# EAGLE board ARM (EAGLE 8.5.0)
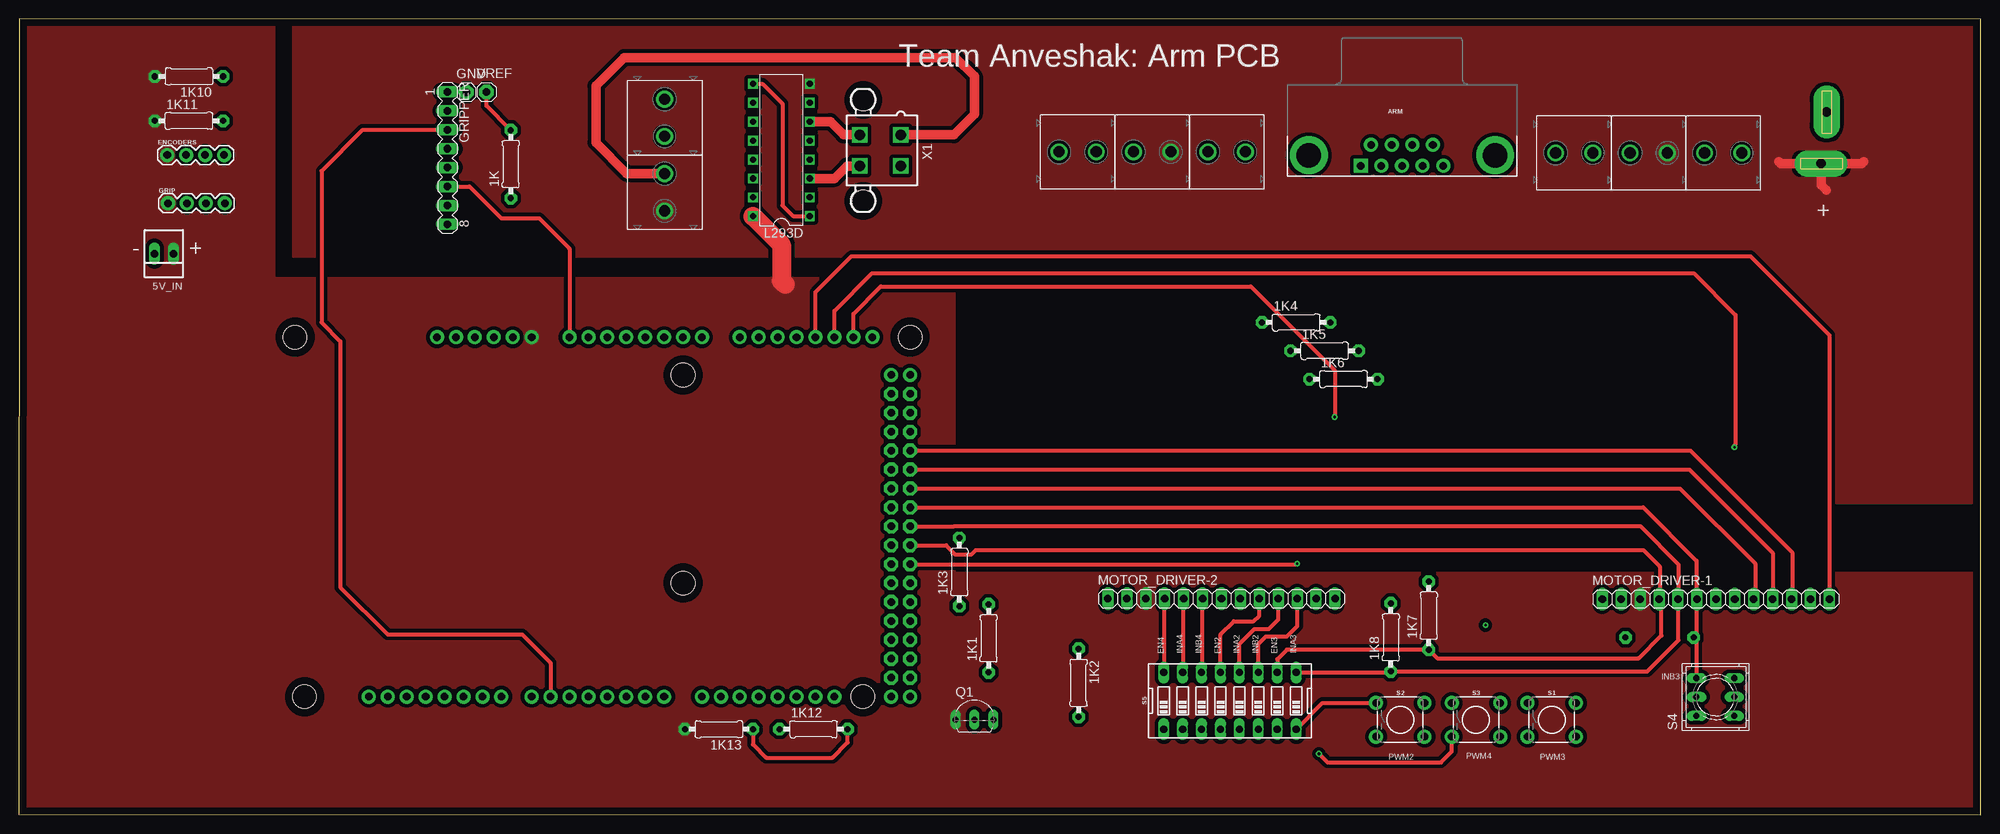
[diagram p0: board, top side]
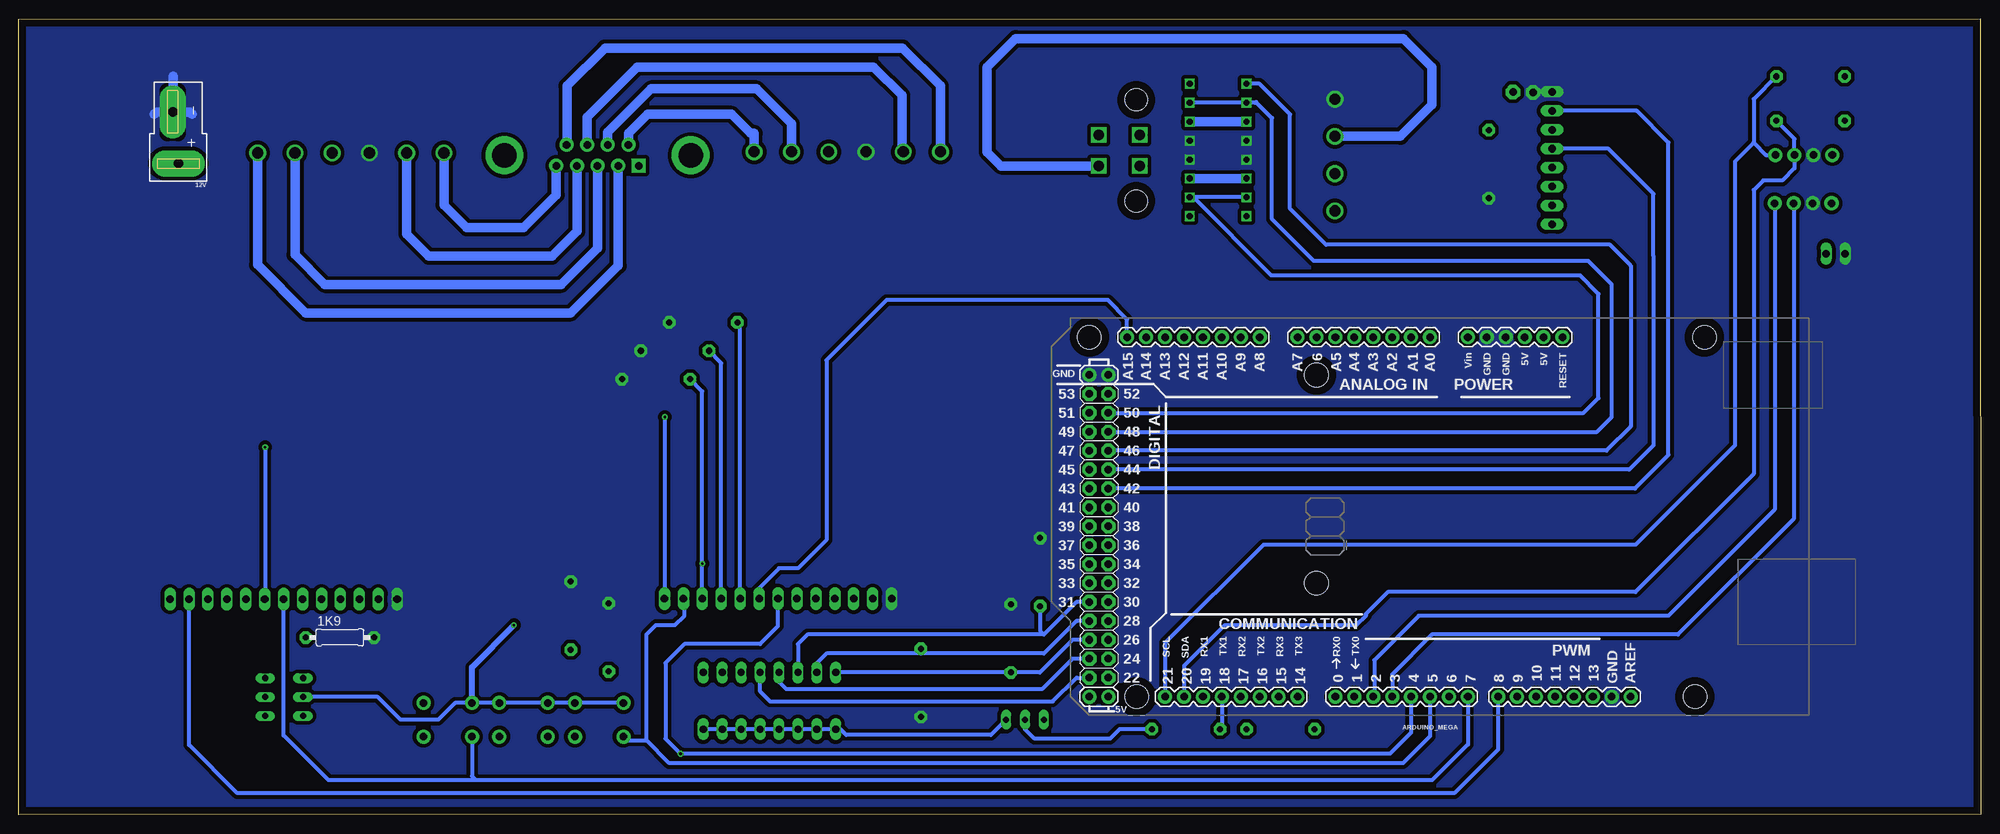
[diagram p1: board, bottom side, seen from below]

Size 263.33 x 106.9 mm. Coordinates in mm from the lower left corner, seen from the top.
Outline: 0,0.08 263.33,0 263.3,106.82 0.1,106.9 0,0.08
Copper layers (1*16): Top 0.035mm / dielectric 1.5mm / Bottom 0.035mm
Design rules "default *": minimum track width 6mil, minimum drill 0.35mm, track to track 20mil, track to pad 20mil, pad to pad 20mil, via to via 20mil, smd to smd 20mil, copper to edge 40mil, drill to drill 6mil, minimum pad ring 10mil, minimum via ring 8mil, stop-mask expansion 4mil, vias tented up to drill 0mil, thermal gap 10mil

## Footprints (pad centres in the part's own frame; a part is rotated, then mirrored left to right if it is on the bottom)
0207/9 = drill 0.813 pad 1.676 octagon: 1 -4.572,0; 2 4.572,0
22-23-2021 = drill 1 long: 1 -1.27,0; 2 1.27,0
DEANS = drill 1.27 pad 3.556 long: + 0,0; - 0.737,-6.921
ARDUINO_MEGA = drill 1.016 pad 1.88: 0 13.97,24.13; 1 11.43,24.13; 2 8.89,24.13; 3 6.35,24.13; 3.3V -13.97,-24.13; 4 3.81,24.13; 5 1.27,24.13; 5V@0 -11.43,-24.13; 5V@1 44.45,24.13; 5V@2 46.99,24.13; 6 -1.27,24.13; 7 -3.81,24.13; 8 -7.874,24.13; 9 -10.414,24.13; 10 -12.954,24.13; 11 -15.494,24.13; 12 -18.034,24.13; 13 -20.574,24.13; 14 19.05,24.13; 15 21.59,24.13; 16 24.13,24.13; 17 26.67,24.13; 18 29.21,24.13; 19 31.75,24.13; 20 34.29,24.13; 21 36.83,24.13; A0 1.27,-24.13; A1 3.81,-24.13; A2 6.35,-24.13; A3 8.89,-24.13; A4 11.43,-24.13; A5 13.97,-24.13; A6 16.51,-24.13; A7 19.05,-24.13; A8 24.13,-24.13; A9 26.67,-24.13; A10 29.21,-24.13; A11 31.75,-24.13; A12 34.29,-24.13; A13 36.83,-24.13; A14 39.37,-24.13; A15 41.91,-24.13; AREF -25.654,24.13; GND@0 -8.89,-24.13; GND@1 -6.35,-24.13; GND@2 44.45,-19.05; GND@3 46.99,-19.05; GND@4 -23.114,24.13; RESET -16.51,-24.13; VIN -3.81,-24.13 | drill 1.016 pad 1.88 octagon: 22 44.45,21.59; 23 46.99,21.59; 24 44.45,19.05; 25 46.99,19.05; 26 44.45,16.51; 27 46.99,16.51; 28 44.45,13.97; 29 46.99,13.97; 30 44.45,11.43; 31 46.99,11.43; 32 44.45,8.89; 33 46.99,8.89; 34 44.45,6.35; 35 46.99,6.35; 36 44.45,3.81; 37 46.99,3.81; 38 44.45,1.27; 39 46.99,1.27; 40 44.45,-1.27; 41 46.99,-1.27; 42 44.45,-3.81; 43 46.99,-3.81; 44 44.45,-6.35; 45 46.99,-6.35; 46 44.45,-8.89; 47 46.99,-8.89; 48 44.45,-11.43; 49 46.99,-11.43; 50 44.45,-13.97; 51 46.99,-13.97; 52 44.45,-16.51; 53 46.99,-16.51 | hole 3.2: -34.29,24.13; -35.56,-24.13; 16.51,8.89; 16.51,-19.05; 40.64,24.13; 46.99,-24.13
DB9 = drill 1.016 pad 1.88 square: 1 -5.54,-1.42 | drill 1.016 pad 1.88: 2 -2.77,-1.42; 3 0,-1.42; 4 2.77,-1.42; 5 5.54,-1.42; 6 -4.15,1.42; 7 -1.38,1.42; 8 1.38,1.42; 9 4.15,1.42 | drill 3.302 pad 5.08: G1 -12.5,0; G2 12.5,0
1X04 = drill 1.016 pad 1.88: 1 0,0; 2 2.54,0; 3 5.08,0; 4 7.62,0
1X01 = drill 1.016 pad 1.93 octagon: 1 0,0
MA08-1 = drill 1.016 long: 1 -8.89,0; 2 -6.35,0; 3 -3.81,0; 4 -1.27,0; 5 1.27,0; 6 3.81,0; 7 6.35,0; 8 8.89,0
DIL16 = drill 0.813 square: 1 -8.89,-3.81; 2 -6.35,-3.81; 3 -3.81,-3.81; 4 -1.27,-3.81; 5 1.27,-3.81; 6 3.81,-3.81; 7 6.35,-3.81; 8 8.89,-3.81; 9 8.89,3.81; 10 6.35,3.81; 11 3.81,3.81; 12 1.27,3.81; 13 -1.27,3.81; 14 -3.81,3.81; 15 -6.35,3.81; 16 -8.89,3.81
EK500V-02P = drill 1.5: P$1 0,0; P$2 5,0
1X13 = drill 1.016 long: 1 -15.24,0; 2 -12.7,0; 3 -10.16,0; 4 -7.62,0; 5 -5.08,0; 6 -2.54,0; 7 0,0; 8 2.54,0; 9 5.08,0; 10 7.62,0; 11 10.16,0; 12 12.7,0; 13 15.24,0
TO92-EBC-OVAL = drill 0.813 long: B 0,-1.27; C 2.54,-1.27; E -2.54,-1.27
TACTILE_SWITCH_PTH_6.0MM = drill 1.016 pad 1.88: 1 -3.251,2.261; 2 3.251,2.261; 3 -3.251,-2.261; 4 3.251,-2.261
9077-2 = drill 0.813 long: 1 -2.54,2.54; 2 0,2.54; 3 2.54,2.54; 4 -2.54,-2.54; 5 0,-2.54; 6 2.54,-2.54
DIPSWITCH-08 = drill 0.97 long: 1 -8.89,-3.81; 2 -6.35,-3.81; 3 -3.81,-3.81; 4 -1.27,-3.81; 5 1.27,-3.81; 6 3.81,-3.81; 7 6.35,-3.81; 8 8.89,-3.81; 9 8.89,3.81; 10 6.35,3.81; 11 3.81,3.81; 12 1.27,3.81; 13 -1.27,3.81; 14 -3.81,3.81; 15 -6.35,3.81; 16 -8.89,3.81
5566-4 = drill 1.4 square: 1 2.1,-2.75; 2 -2.1,-2.75; 3 2.1,2.75; 4 -2.1,2.75 | hole 3: 6.8,2.29; -6.8,2.29

## Placement (x,y rotation side)
1K  [0207/9]  66.03,87.37 90 top
1K1  [0207/9]  130.18,23.7 90 top
1K2  [0207/9]  142.24,17.73 270 top
1K3  [0207/9]  126.24,32.59 90 top
1K4  [0207/9]  171.45,66.12 0 top
1K5  [0207/9]  175.26,62.31 0 top
1K6  [0207/9]  177.8,58.5 0 top
1K7  [0207/9]  189.23,26.75 90 top
1K8  [0207/9]  184.15,23.83 90 top
1K9  [0207/9]  220.22,23.83 0 bottom
1K10  [0207/9]  22.86,99.14 180 top
1K11  [0207/9]  22.86,93.17 0 top
1K12  [0207/9]  106.68,11.51 0 top
1K13  [0207/9]  93.98,11.51 180 top
5V_IN  22-23-2021  [22-23-2021]  19.48,75.34 180 top
12V  [DEANS]  241.91,87.44 180 bottom
ARDUINO_MEGA  ARDUINO_MEGA_R3FULL  [ARDUINO_MEGA]  72.65,40.01 180 bottom
ARM  [DB9]  185.64,88.55 0 top
ENCODERS  [1X04]  19.94,88.6 0 top
GND  [1X01]  60.09,97.01 0 top
GRIP  [1X04]  20.04,82.12 0 top
GRIPPER  [MA08-1]  57.55,88.17 270 top
L293D  L293D  [DIL16]  102.36,89.26 90 top
M1  ST02-5MM  [EK500V-02P]  144.62,89.02 180 top
M2  ST02-5MM  [EK500V-02P]  164.62,89.02 180 top
M3  ST02-5MM  [EK500V-02P]  211.25,88.87 180 top
M4  ST02-5MM  [EK500V-02P]  231.25,88.87 180 top
MOTOR_DRIVER-1  [1X13]  227.77,28.97 0 top
MOTOR_DRIVER-2  [1X13]  161.42,29.02 0 top
PSCREW1  ST02-5MM  [EK500V-02P]  86.69,91.1 90 top
PSCREW2  ST02-5MM  [EK500V-02P]  86.69,81.1 90 top
PWR1  ST02-5MM  [EK500V-02P]  154.62,89.02 180 top
PWR2  ST02-5MM  [EK500V-02P]  221.25,88.87 180 top
Q1  2N2907  [TO92-EBC-OVAL]  128.27,14.05 0 top
S1  [TACTILE_SWITCH_PTH_6.0MM]  205.74,12.78 0 top
S2  [TACTILE_SWITCH_PTH_6.0MM]  185.42,12.78 0 top
S3  [TACTILE_SWITCH_PTH_6.0MM]  195.58,12.78 0 top
S4  9077-2  [9077-2]  227.71,15.83 90 top
S5  [DIPSWITCH-08]  162.56,15.32 0 top
VREF  [1X01]  62.79,97.05 0 top
X1  5566-4  [5566-4]  115.64,89.21 90 top

## Library data of the parts
1K 1K1-1K13 GND MOTOR_DRIVER-1 MOTOR_DRIVER-2 Q1 VREF = adafruit
5V_IN = con-molex; MF: MOLEX; MPN: 22-23-2021; OC_FARNELL: 1462926; OC_NEWARK: 25C3832
12V = SparkFun-Connectors; SF_ID: PRT-11864
ARDUINO_MEGA = SparkFun-Boards
ARM = SparkFun-Connectors; PROD_ID: CONN-08194
ENCODERS GRIP = SparkFun-Connectors; PROD_ID: CONN-09696
GRIPPER = con-lstb; OC_FARNELL: unknown; OC_NEWARK: unknown
L293D = Robocon2k14; MPN: L293D; OC_FARNELL: 9589619; OC_NEWARK: 56P8249
M1-M4 PSCREW1 PSCREW2 PWR1 PWR2 = con-dinkle
S1-S3 = SparkFun-Switches; PROD_ID: SWCH-08441; SF_SKU: COM-00097
S4 = switch-misc
S5 = SparkFun-Switches; PROD_ID: SWCH-12197; SF_SKU: COM-08034
X1 = con-molex; OC_FARNELL: unknown; OC_NEWARK: unknown

## Nets
2: ARM.5 M3.P$2
3: ARM.4 M3.P$1
3V3: GRIPPER.7
4: ARM.3 M4.P$2
5: ARM.2 M4.P$1
6: ARM.6 M2.P$1
7: ARM.7 M2.P$2
8: ARM.8 M1.P$1
9: ARM.9 M1.P$2
12V: 12V.+ L293D.8 PSCREW2.P$1 PWR1.P$1 PWR2.P$1
CS1: ARDUINO_MEGA.A12 MOTOR_DRIVER-1.13
CS2: ARDUINO_MEGA.A14 MOTOR_DRIVER-2.13
CS3: ARDUINO_MEGA.A13 MOTOR_DRIVER-1.8
CS4: ARDUINO_MEGA.A15 MOTOR_DRIVER-2.8
CS-G: ARDUINO_MEGA.A0 GRIPPER.6
DIR: ARDUINO_MEGA.42 GRIPPER.2
EN1: ARDUINO_MEGA.43 MOTOR_DRIVER-1.9
EN2: 1K4.1 ARDUINO_MEGA.25 MOTOR_DRIVER-2.9 S5.13
EN3: 1K7.1 ARDUINO_MEGA.37 MOTOR_DRIVER-1.4 S5.10
EN4: 1K1.1 ARDUINO_MEGA.27 MOTOR_DRIVER-2.4 S5.16
ENABLE: ARDUINO_MEGA.46 L293D.1 L293D.9
ENCA1: ARDUINO_MEGA.3 GRIP.3
ENCA2: ARDUINO_MEGA.2 GRIP.4
FLT: GRIPPER.5
GND: 1K1.2 1K2.2 1K3.2 1K4.2 1K5.2 1K6.2 1K7.2 1K8.2 1K9.2 1K.1 5V_IN.2 12V.- ARDUINO_MEGA.GND@0 ARDUINO_MEGA.GND@1 ARDUINO_MEGA.GND@2 ARDUINO_MEGA.GND@3 ARDUINO_MEGA.GND@4 ENCODERS.2 GND.1 GRIP.2 GRIPPER.1 L293D.4 L293D.5 L293D.12 L293D.13 MOTOR_DRIVER-1.1 MOTOR_DRIVER-2.1 PSCREW1.P$2 PWR1.P$2 PWR2.P$2
INA1: ARDUINO_MEGA.45 MOTOR_DRIVER-1.10
INA2: 1K5.1 ARDUINO_MEGA.23 MOTOR_DRIVER-2.10 S5.12
INA3: 1K8.1 ARDUINO_MEGA.39 MOTOR_DRIVER-1.5 S5.9
INA4: 1K2.1 ARDUINO_MEGA.29 MOTOR_DRIVER-2.5 S5.15
INB1: ARDUINO_MEGA.47 MOTOR_DRIVER-1.11
INB2: 1K6.1 ARDUINO_MEGA.35 MOTOR_DRIVER-2.11 S5.11
INB3: 1K9.1 ARDUINO_MEGA.41 MOTOR_DRIVER-1.6 S4.3
INB4: 1K3.1 ARDUINO_MEGA.31 MOTOR_DRIVER-2.6 S5.14
INPUT1: ARDUINO_MEGA.48 L293D.7 L293D.10
INPUT2: ARDUINO_MEGA.50 L293D.2 L293D.15
MANUAL_EN: 1K12.1 ARDUINO_MEGA.18
MOT1_A: L293D.3 L293D.14 X1.4
MOT1_B: L293D.6 L293D.11 X1.3
MOT2_A: PSCREW2.P$2 X1.1
MOT2_B: PSCREW1.P$1 X1.2
N$1: 1K.2 VREF.1
N$2: Q1.C S1.1 S2.1 S3.1 S4.2 S5.1 S5.2 S5.3 S5.4 S5.5 S5.6 S5.7 S5.8
N$4: 1K12.2 1K13.1 Q1.B
PWM1: ARDUINO_MEGA.8 MOTOR_DRIVER-1.12
PWM2: ARDUINO_MEGA.5 MOTOR_DRIVER-2.12 S2.3
PWM3: ARDUINO_MEGA.7 MOTOR_DRIVER-1.7 S1.3
PWM4: ARDUINO_MEGA.4 MOTOR_DRIVER-2.7 S3.3
PWM-G: ARDUINO_MEGA.6 GRIPPER.3
SCL: 1K10.1 ARDUINO_MEGA.21 ENCODERS.4
SDA: 1K11.2 ARDUINO_MEGA.20 ENCODERS.3
SLP: ARDUINO_MEGA.44 GRIPPER.4
VCC: 1K10.2 1K11.1 1K13.2 5V_IN.1 ARDUINO_MEGA.VIN ENCODERS.1 GRIP.1 L293D.16 MOTOR_DRIVER-1.3 MOTOR_DRIVER-2.3 Q1.E
VM: GRIPPER.8

## Tracks (layer width: path | path; a pad name or v marks a point on that pad's centre or on a via)
2
  Bottom 1.27: ARM.5 191.18,83.22 195.58,78.82 203.2,78.82 206.25,81.87 M3.P$2
3
  Bottom 1.27: M3.P$1 211.25,77.98 208.28,75.01 191.77,75.01 188.41,78.37 ARM.4
4
  Bottom 1.27: M4.P$2 226.25,75.2 222.25,71.2 190.5,71.2 185.64,76.06 ARM.3
5
  Bottom 1.27: M4.P$1 231.25,73.85 224.79,67.39 189.23,67.39 182.88,73.74 ARM.2
6
  Bottom 1.27: M2.P$1 164.62,91.52 165.1,91.52 167.64,94.06 178.95,94.06 181.49,91.52 ARM.6
7
  Bottom 1.27: M2.P$2 159.62,92.79 164.32,97.49 178.44,97.49 184.26,91.67 ARM.7
8
  Bottom 1.27: M1.P$1 144.78,89.18 144.78,96.6 148.59,100.41 180.34,100.41 187.07,93.68 187.07,90.02 ARM.8
9
  Bottom 1.27: ARM.9 189.74,90.02 189.74,97.87 184.66,102.95 144.7,102.95 139.62,97.87 M1.P$2
12V
  Top 1.27: 12V.+ 236.49,87.44 236.22,87.71 | 12V.+ 247.38,87.44 247.65,87.71 | 12V.+ 241.91,84.56 242.57,83.9
  pour Top (no thermals): 36.9,125.68 36.9,75.08 131.42,75.08 131.42,42.02 263.72,42.02 263.72,125.68
CS1
  Top 0.508: ARDUINO_MEGA.A12 106.94,70.19 111.76,75.01 232.41,75.01 243.01,64.41 MOTOR_DRIVER-1.13
CS2  (via drill 0.35)
  Top 0.508: ARDUINO_MEGA.A14 112.02,67.27 115.7,70.95 165.35,70.95 176.62,59.68 v176.62,53.42
  Bottom 0.508: MOTOR_DRIVER-2.13 176.62,28.98 v176.62,53.42
CS3  (via drill 0.35)
  Top 0.508: v230.25,49.36 230.25,49.61 230.38,49.74 230.38,67.14 224.79,72.73 114.55,72.73 109.48,67.65 ARDUINO_MEGA.A13
  Bottom 0.406: 230.25,29.01 MOTOR_DRIVER-1.8
  Bottom 0.508: MOTOR_DRIVER-1.8 | v230.25,49.36 230.25,29.01
CS4
  Bottom 0.508: MOTOR_DRIVER-2.8 164.02,28.96 164.02,30.37 161.29,33.1 158.75,33.1 154.94,36.91 154.94,61.04 146.85,69.13 122.67,69.13 117.17,69.13 114.56,66.52 ARDUINO_MEGA.A15
CS-G
  Top 0.508: GRIPPER.6 60.5,84.36 64.77,80.09 69.85,80.09 73.92,76.02 ARDUINO_MEGA.A0
  Bottom 0.508: 57.6,84.41 GRIPPER.6
DIR
  Top 0.508: 57.47,94.44 GRIPPER.2
  Bottom 0.508: ARDUINO_MEGA.42 46.43,43.82 41.91,48.34 41.91,90.25 46.18,94.52 GRIPPER.2
EN1
  Top 0.508: ARDUINO_MEGA.43 222.96,43.82 233.04,33.74 233.04,29.17 MOTOR_DRIVER-1.9
  Bottom 0.508: MOTOR_DRIVER-1.9
EN2
  Top 0.508: MOTOR_DRIVER-2.9 166.5,26.75 165.74,25.99 163.07,25.99 161.29,24.21 S5.13
  Bottom 0.508: ARDUINO_MEGA.25 121.92,20.96 126.01,16.87 160.3,16.87 161.29,17.86 S5.13 | 1K4.1 166.5,65.74 MOTOR_DRIVER-2.9
EN3
  Top 0.406: 220.22,28.9 MOTOR_DRIVER-1.4
  Top 0.508: ARDUINO_MEGA.37 124.46,36.2 125.66,35.01 127.89,35.01 128.45,35.57 218.01,35.57 220.22,33.36 220.22,28.9 220.47,28.65 220.47,24.08 217.42,21.04 190.37,21.04 1K7.1 170.18,22.18 168.91,20.91 S5.10
EN4
  Top 0.406: S5.16 153.8,19.26
  Top 0.508: 153.8,19.26 MOTOR_DRIVER-2.4
  Bottom 0.406: 1K1.1 130.81,19.13
  Bottom 0.508: ARDUINO_MEGA.27 121.92,23.5 126.29,19.13 1K1.1 S5.16
ENABLE
  Top 0.508: L293D.9 99.83,98.15 102.51,95.47 102.51,81.82 103.91,80.42 106.12,80.42 L293D.1
  Bottom 0.508: ARDUINO_MEGA.46 50.24,48.9 46.99,52.15 46.99,73.74 49.78,76.53 87.88,76.53 92.71,81.36 92.71,94.06 96.8,98.15 L293D.9
ENCA1
  Bottom 0.508: ARDUINO_MEGA.3 79,18.87 73.66,24.21 40.64,24.21 25.12,39.73 GRIP.3
ENCA2
  Bottom 0.508: ARDUINO_MEGA.2 81.41,16.01 81.41,20.78 75.44,26.75 41.91,26.75 27.66,41 GRIP.4
GND
  Bottom 1.27: 12V.- 242.57,94.44 242.57,99.14 | 12V.- 244.81,94.36 245.11,94.06 | 12V.- 240.33,94.36 240.03,94.06
  pour Bottom (no thermals): -3.18,128.18 -3.18,-9.62 273.07,-9.62 273.07,128.18
INA1
  Top 0.508: MOTOR_DRIVER-1.10 235.39,35.2 224.23,46.36 ARDUINO_MEGA.45
INA2
  Top 0.508: S5.12 163.83,22.94 165.86,24.97 167.77,24.97 169.04,26.25 MOTOR_DRIVER-2.10
  Bottom 0.508: ARDUINO_MEGA.23 121.36,18.42 124.56,15.22 162.46,15.22 163.83,16.59 S5.12 | 1K5.1 169.04,60.66 MOTOR_DRIVER-2.10
INA3
  Top 0.508: ARDUINO_MEGA.39 125.55,38.74 125.58,38.77 217.6,38.77 222.76,33.61 222.76,29.04 | 222.76,29.04 MOTOR_DRIVER-1.5 | S5.9 184.02,19.13 1K8.1 218.57,19.26 222.76,23.45 222.76,29.04
INA4
  Top 0.406: S5.15 156.34,19.26
  Top 0.508: 156.34,19.26 MOTOR_DRIVER-2.5
  Bottom 0.406: 1K2.1 142.24,21.67
  Bottom 0.508: ARDUINO_MEGA.29 121.36,26.04 125.73,21.67 142.24,21.67 154.94,21.67 156.21,20.4 S5.15
INB1
  Top 0.406: 238,29.04 MOTOR_DRIVER-1.11
  Top 0.508: 238,29.04 238,35.26 224.36,48.9 ARDUINO_MEGA.47
INB2  (via drill 0.35)
  Top 0.508: S5.11 166.37,22.94 167.39,23.96 170.18,23.96 171.58,25.36 MOTOR_DRIVER-2.11 | ARDUINO_MEGA.35 171.5,33.66 v171.58,33.74
  Bottom 0.406: 171.45,29.15 MOTOR_DRIVER-2.11
  Bottom 0.508: MOTOR_DRIVER-2.11 v171.58,33.74 171.58,56.85 1K6.1
INB3
  Top 0.406: 225.17,28.91 MOTOR_DRIVER-1.6 225.23,28.02 225.17,28.08
  Top 0.508: 225.17,28.08 225.17,34.12 218.01,41.28 ARDUINO_MEGA.41 | MOTOR_DRIVER-1.6 225.23,24.27 1K9.1 225.17,23.45 S4.3
INB4
  Top 0.406: S5.14 158.88,19.26
  Top 0.508: 158.88,19.26 MOTOR_DRIVER-2.6
  Bottom 0.508: ARDUINO_MEGA.31 121.36,28.58 125.73,24.21 | 125.73,24.21 157.48,24.21 158.75,22.94 S5.14 | 1K3.1 126.24,24.72 125.73,24.21
INPUT1
  Bottom 0.508: 106.4,95.84 L293D.7 L293D.10 97.39,95.61 97.28,95.71 95.12,93.55 95.12,79.96 89.53,74.38 52.7,74.38 49.53,71.2 49.53,53.42 51.51,51.44 ARDUINO_MEGA.48
INPUT2
  Bottom 0.406: 51.36,55.96 51.31,55.96
  Bottom 0.508: L293D.15 L293D.2 105.69,82.91 95.25,72.47 53.85,72.47 51.31,69.93 51.31,55.96 | ARDUINO_MEGA.50 53.34,53.98 51.36,55.96
MANUAL_EN
  Bottom 0.508: ARDUINO_MEGA.18 101.86,11.76 1K12.1
MOT1_A
  Top 1.27: L293D.3 109.5,85.45 111.16,87.11 X1.4
  Bottom 1.27: L293D.14 L293D.3 106.22,85.4
MOT1_B
  Top 1.27: L293D.6 108.94,93.07 110.7,91.31 X1.3
  Bottom 1.27: L293D.11 L293D.6 106.22,93.02
MOT2_A
  Top 1.27: X1.1 125.52,91.31 128.27,94.06 128.27,99.14 125.73,101.68 81.28,101.68 77.47,97.87 77.47,90.25 81.62,86.1 PSCREW2.P$2
MOT2_B
  Bottom 1.27: X1.2 131.48,87.11 133.35,88.98 133.35,100.41 129.54,104.22 77.47,104.22 73.66,100.41 73.66,95.33 77.89,91.1 PSCREW1.P$1
N$1
  Top 0.508: 1K.2 62.79,95.18 VREF.1
N$2  (via drill 0.35)
  Top 0.508: S5.8 174.98,15.04 S2.1
  Bottom 0.508: Q1.C 132.84,10.75 152.27,10.75 153.03,11.51 S5.1 S5.2 S5.3 S5.4 S5.5 S5.6 S5.7 S5.8 | S2.1 S3.1 S1.1 204.75,15.04 207.01,12.78 212.09,12.78 215.14,15.83 S4.2
  Bottom 0.813: S1.1 202.49,19.84 v196.85,25.48
N$4
  Top 0.508: 1K13.1 98.55,9.48 100.33,7.7 109.22,7.7 111.25,9.73 1K12.2
  Bottom 0.508: 1K12.2 115.57,11.51 116.84,10.24 127,10.24 128.27,11.51 Q1.B
PWM1
  Top 0.508: 240.45,28.95 MOTOR_DRIVER-1.12
  Bottom 0.406: 226.06,2.93 226.22,2.93
  Bottom 0.508: ARDUINO_MEGA.8 64.78,8.82 70.67,2.93 226.06,2.93 233.99,2.93 240.47,9.41 MOTOR_DRIVER-1.12
PWM2
  Bottom 0.508: ARDUINO_MEGA.5 73.92,10.58 77.56,6.94 176.02,6.94 179.07,9.99 | MOTOR_DRIVER-2.12 173.99,28.89 173.99,26.75 175.26,25.48 177.8,25.48 179.07,24.21 179.07,9.99 | 179.07,9.99 181.63,9.99 S2.3
PWM3
  Top 0.508: 227.75,28.95 MOTOR_DRIVER-1.7
  Bottom 0.508: ARDUINO_MEGA.7 68.84,9.46 73.65,4.65 201.93,4.65 | S1.3 202.49,5.21 201.93,4.65 | 201.93,4.65 221.74,4.65 227.77,10.68 MOTOR_DRIVER-1.7
PWM4  (via drill 0.35)
  Top 0.508: v174.5,8.21 175.64,7.07 190.88,7.07 192.33,8.51 S3.3
  Bottom 0.508: ARDUINO_MEGA.4 76.46,11.04 79.29,8.21 v174.5,8.21 176.53,10.24 176.53,20.4 173.99,22.94 163.83,22.94 161.42,25.35 MOTOR_DRIVER-2.7
PWM-G
  Top 0.508: ARDUINO_MEGA.6 71.38,20.4 67.57,24.21 49.53,24.21 43.18,30.56 43.18,63.58 40.64,66.12 40.64,86.44 46.18,91.98 GRIPPER.3
SCL
  Bottom 0.508: 1K10.1 30.48,96.09 30.48,90.25 | ENCODERS.4 28.83,88.6 30.48,90.25 | 30.48,90.25 33.02,87.71 33.02,49.61 46.35,36.28 96.27,36.28 109.47,23.07 ARDUINO_MEGA.21
SDA
  Bottom 0.508: 1K11.2 25.02,90.76 ENCODERS.3 25.02,86.82 26.67,85.17 29.21,85.17 30.48,83.9 30.48,45.8 46.35,29.93 79.61,29.93 82.55,26.98 82.55,26.75 83.88,25.42 101.54,25.42 106.93,20.02 ARDUINO_MEGA.20
SLP
  Top 0.508: 57.5,89.49 GRIPPER.4
  Bottom 0.406: 43.94,75.52 43.94,75.01
  Bottom 0.508: ARDUINO_MEGA.44 47.19,46.36 43.94,49.61 43.94,75.01 43.94,83.39 49.99,89.44 GRIPPER.4
VCC
  Top 0.508: 102.36,71.71 102.87,72.21 102.87,72.47
  Top 2.54: 102.87,71.2 102.36,71.71 102.36,76.56 L293D.16
  pour Top (no thermals): 0.37,122.44 0.37,-0.97 264.07,-0.97 264.07,32.34 125.52,32.34 125.52,71.93 34.26,71.93 34.26,122.44

## Text on the board
tNames: - | Team Anveshak: Arm PCB | + | - | + | - | EN4 | INA4 | INB4 | EN2 | INA2 | INB2 | EN3 | INA3 | INB3 | PWM2 | PWM4 | PWM3